# Altium PCB Motor Controller_v1.2.PcbDoc
Units mm, origin at the board's own origin, x right, y up, seen from the top; angles counter-clockwise.
Board outline 57 x 53.13 mm, 2 copper layers (Top Layer, Bottom Layer); 17 components, 29 nets, 114 pads, 10 vias.
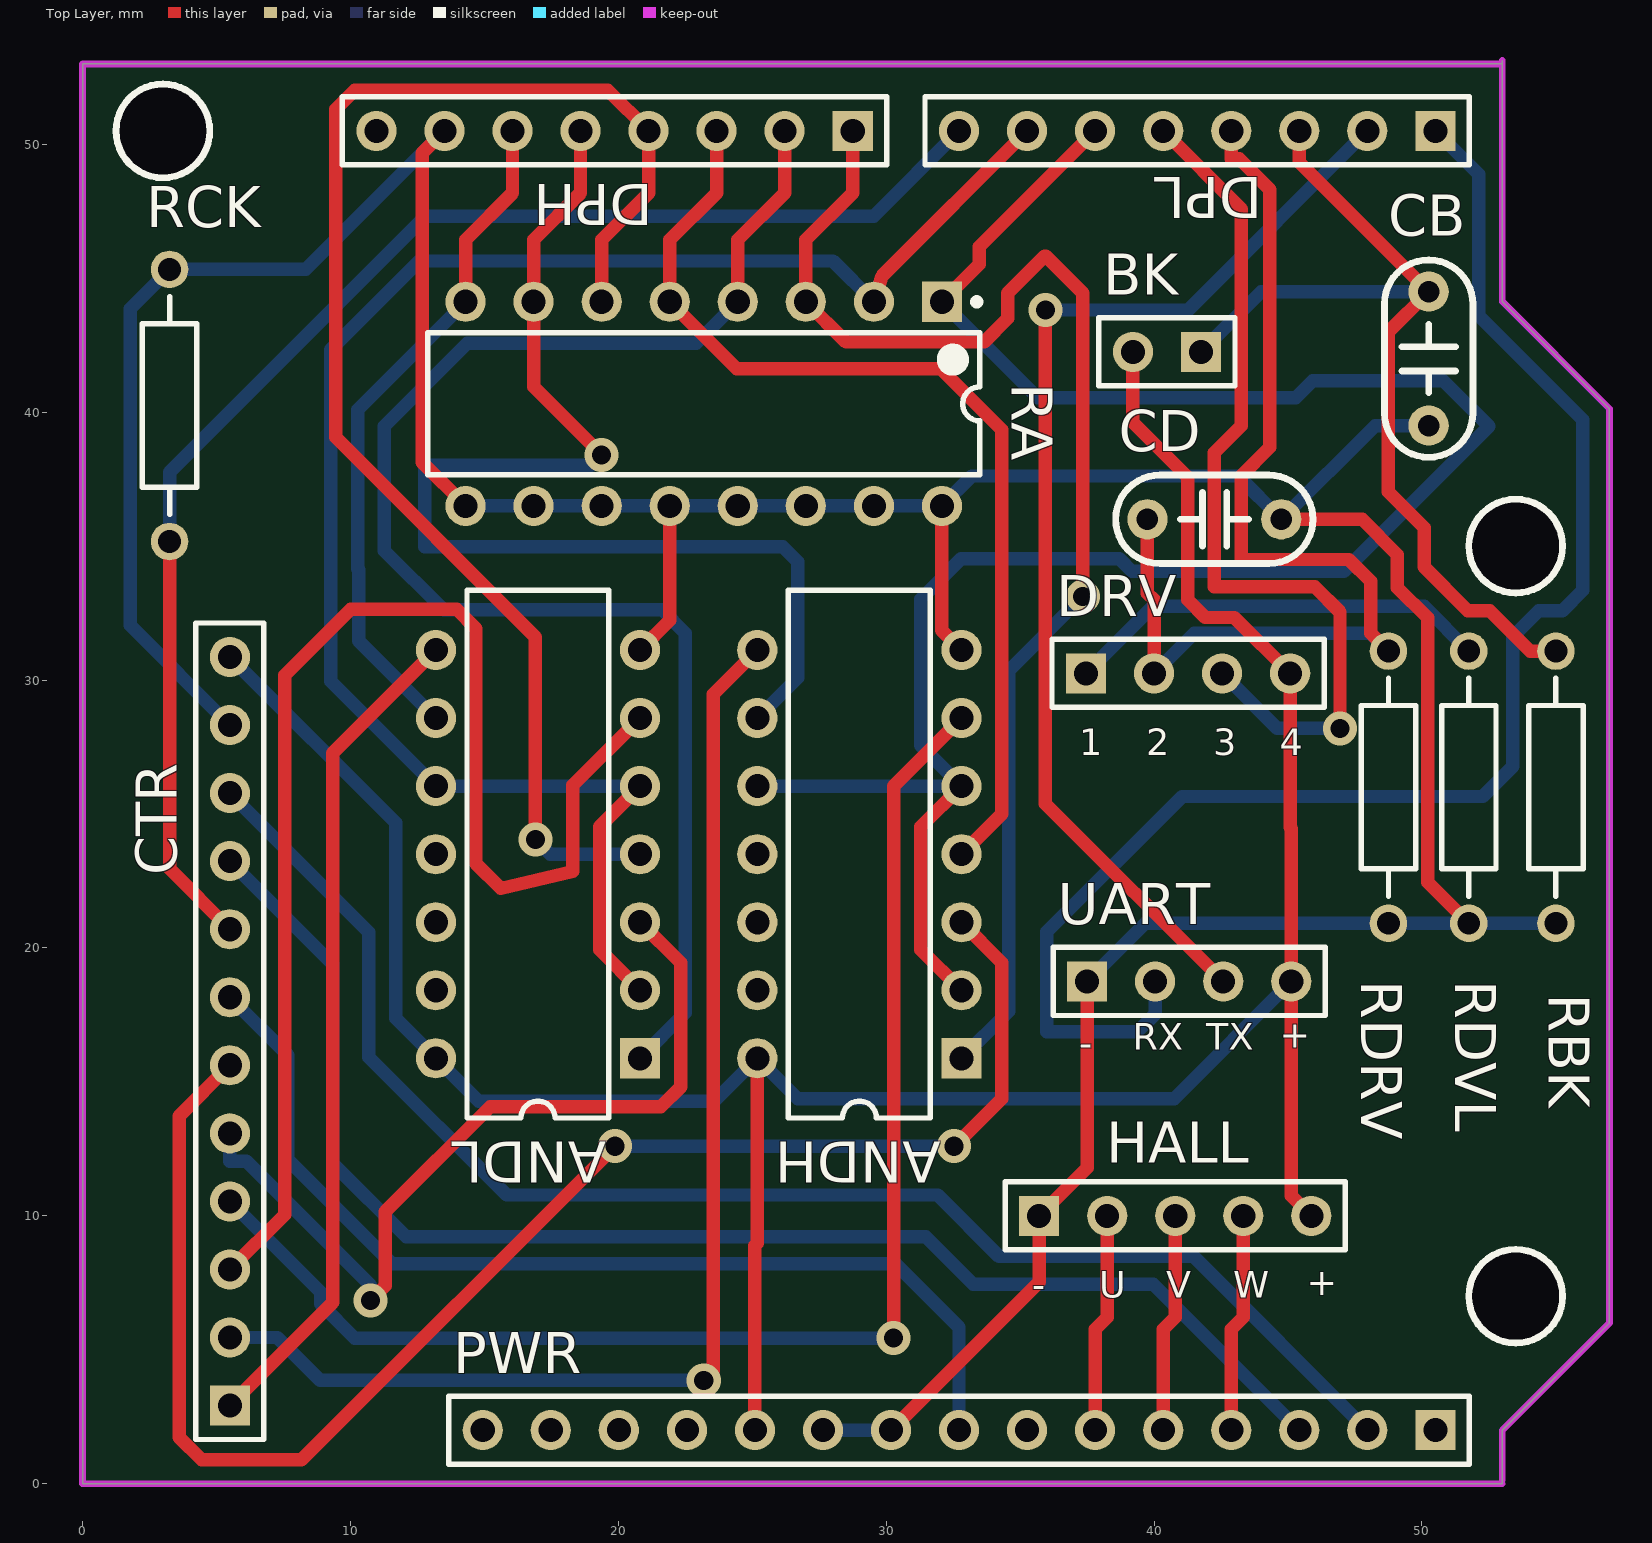
[diagram p0: Top Layer view]
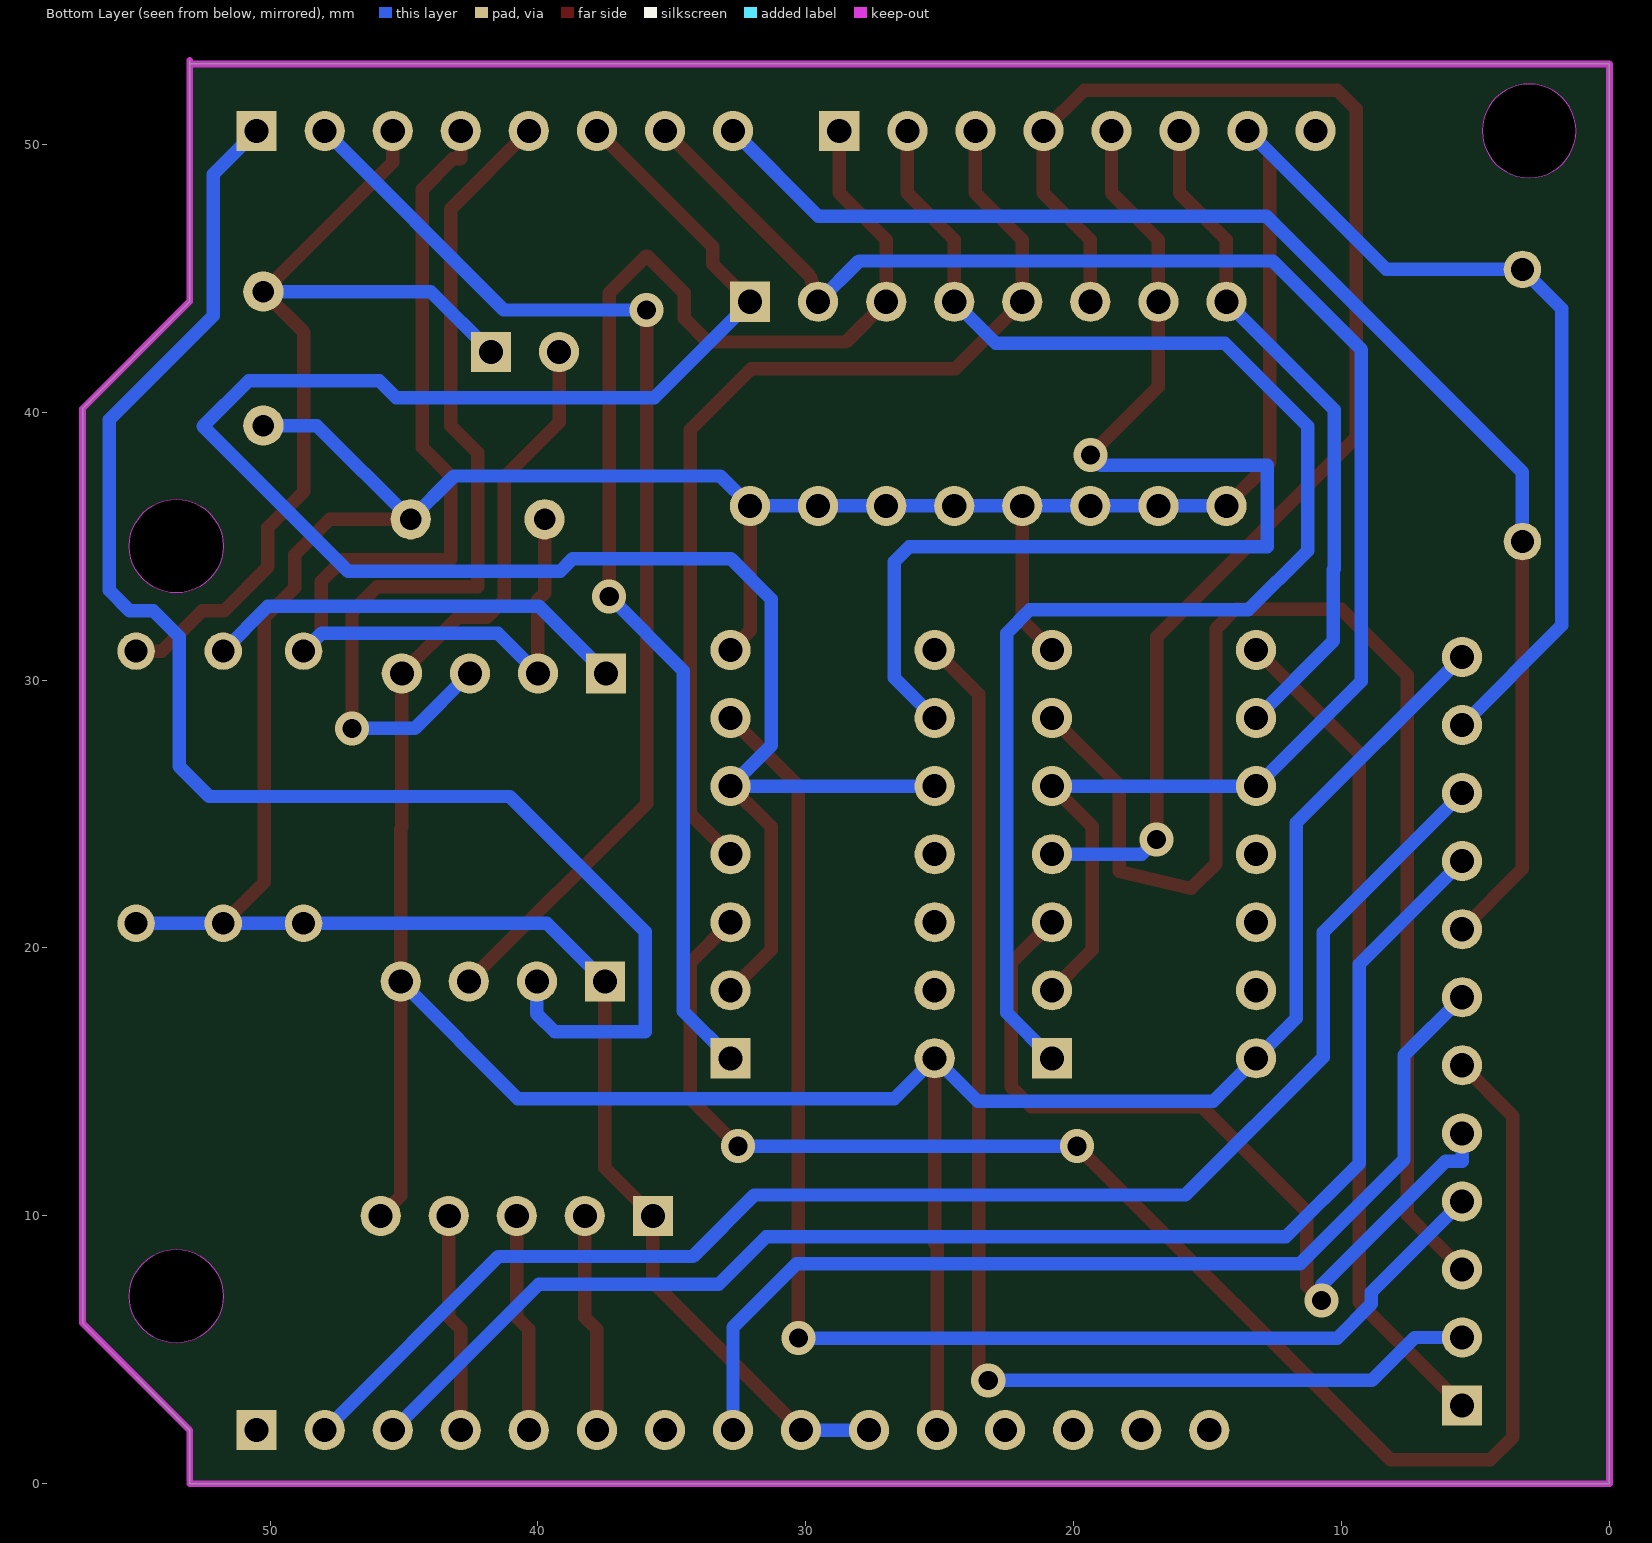
[diagram p1: Bottom Layer view, seen from below]

## Layer stack, top to bottom
Top Solder: solder mask 0.0102, Solder Resist, Dk 3.5
Top Layer: signal copper 0.0356
Dielectric 1: dielectric 0.32, FR-4, Dk 4.8
Bottom Layer: signal copper 0.0356
Bottom Solder: solder mask 0.0102, Solder Resist, Dk 3.5

## Board outline
0,0 0,53 53,53 53,53.127 53,44.127 57,40.127 57,6 53,2 53,0
cut-out: 51.75,7 ccw(c53.5,7) 53.5,5.25 ccw(c53.5,7) 55.25,7 ccw(c53.5,7) 53.5,8.75 ccw(c53.5,7)
cut-out: 51.75,35 ccw(c53.5,35) 53.5,33.25 ccw(c53.5,35) 55.25,35 ccw(c53.5,35) 53.5,36.75 ccw(c53.5,35)
cut-out: 3,48.75 cw(c3,50.5) 1.25,50.5 cw(c3,50.5) 3,52.25 cw(c3,50.5) 4.75,50.5 cw(c3,50.5)

## Design rules (kind name [scope] priority, off if disabled: settings)
Clearance [All] p1: gap=0.5 ignorepadtopadclearanceinfootprint=FALSE
PolygonConnect [All] p1: connectstyle=Relief reliefconductorwidth=0.254 reliefentries=4 polygonreliefangle="90 Angle" airgapwidth=0.254
RoutingVias [All] p1: holewidth=0.711 width=1.27 viastyle="Through Hole" minholewidth=0.711 minwidth=1.27 maxholewidth=0.711 maxwidth=1.27
SolderMaskExpansion [All] p1: expansion=0.102 istentingtop=FALSE
Width [All] p1: maxlimit=1 minlimit=0.254 preferedwidth=0.5
30 further rules are at their usual default settings.

## Components (designator, comment, footprint, x,y, rotation, side; value= is the part's Value field where it differs from the comment)
ANDH "SN74ALS08N" N014 29,23.5 r90 top
ANDL "SN74ALS08N" N014 17,23.5 r90 top
BK "Header 2" HDR1X2 41.75,42.25 r180 top
CB "Cap" "CBB 6.3*6.3*5" 50.25,42 r90 top value=100pF
CD "Cap" "CBB 6.3*6.3*5" 42.25,36 r180 top value=100pF
CTR "Header 12" HDR1X12 5.5,2.92 r90 top
DPH "Header 8" HDR1X8 28.75,50.5 r180 top
DPL "Header 8" HDR1X8 50.5,50.5 r180 top
DRV "Header 4" HDR1X4 37.46,30.25 r0 top
HALL "Header 5" HDR1X5 35.71,10 r0 top
PWR "Header 15" HDR1X15 50.5,2 r180 top
RA "Res Pack2" DIP-16 23.19,40.31 r270 top value=1K
RBK "Res2" AXIAL-0.4 55,26 r90 top value=1K
RCK "Res2" AXIAL-0.4 3.25,40.25 r270 top value=1K
RDRV "Res2" AXIAL-0.4 48.75,26 r90 top value=1K
RDVL "Res2" AXIAL-0.4 51.75,26 r90 top value=220
UART "Header 4" HDR1X4 37.5,18.75 r0 top

## Footprints (in the part's own frame and the unit in brackets; to place one, negate y for a bottom-side part, rotate by r counter-clockwise, add the part's x,y. Pads: shape width x height; smd on the part's side, far side on the other; paste and mask are expansions set on the pad)
AXIAL-0.4 [mm] "Axial Device, Thru-Hole; 2 Leads; 0.4 in Pin Spacing"
  round 1.4 hole 0.85: 1(-5.08,0) 2(5.08,0)
  silkscreen extent -4.06,-1.02 4.06,1.02
"CBB 6.3*6.3*5" [mm] "脚距5mm高6.3mm厚3mm"
  round 1.5 hole 0.8: 1(-2.5,0) 2(2.5,0)
  silkscreen extent -3.68,-1.65 3.68,1.65, body extent -3.15,-1.5 3.15,1.5, height 6.8
DIP-16 [mm] "DIP; 16 Leads; Row Spacing 7.62 mm; Pitch 2.54 mm"
  rect 1.5x1.5 hole 0.9: 1(-3.81,8.89)
  round 1.5 hole 0.9: 2(-3.81,6.35) 3(-3.81,3.81) 4(-3.81,1.27) 5(-3.81,-1.27) 6(-3.81,-3.81) 7(-3.81,-6.35) 8(-3.81,-8.89) 9(3.81,-8.89) 10(3.81,-6.35) 11(3.81,-3.81) 12(3.81,-1.27) 13(3.81,1.27) 14(3.81,3.81) 15(3.81,6.35) 16(3.81,8.89)
  silkscreen extent -3.93,-10.3 2.65,10.32, body extent -3.6,-10.28 3.6,10.28, height 5.08
HDR1X2 [mm] "Connector; Header; 2 Position"
  rect 1.5x1.5 hole 0.9: 1(0,0)
  round 1.5 hole 0.9: 2(2.54,0)
  silkscreen extent -1.27,-1.27 3.81,1.27
HDR1X4 [mm] "Connector; Header; 4 Position"
  rect 1.5x1.5 hole 0.9: 1(0,0)
  round 1.5 hole 0.9: 2(2.54,0) 3(5.08,0) 4(7.62,0)
  silkscreen extent -1.27,-1.27 8.89,1.27
HDR1X5 [mm] "Connector; Header; 5 Position"
  rect 1.5x1.5 hole 0.9: 1(0,0)
  round 1.5 hole 0.9: 2(2.54,0) 3(5.08,0) 4(7.62,0) 5(10.16,0)
  silkscreen extent -1.27,-1.27 11.43,1.27
HDR1X8 [mm] "Connector; Header; 8 Position"
  rect 1.5x1.5 hole 0.9: 1(0,0)
  round 1.5 hole 0.9: 2(2.54,0) 3(5.08,0) 4(7.62,0) 5(10.16,0) 6(12.7,0) 7(15.24,0) 8(17.78,0)
  silkscreen extent -1.27,-1.27 19.05,1.27
HDR1X12 [mm] "Connector; Header; 12 Position"
  rect 1.5x1.5 hole 0.9: 1(0,0)
  round 1.5 hole 0.9: 2(2.54,0) 3(5.08,0) 4(7.62,0) 5(10.16,0) 6(12.7,0) 7(15.24,0) 8(17.78,0) 9(20.32,0) 10(22.86,0) 11(25.4,0) 12(27.94,0)
  silkscreen extent -1.27,-1.27 29.21,1.27
HDR1X15 [mm] "Connector; Header; 15 Position"
  rect 1.5x1.5 hole 0.9: 1(0,0)
  round 1.5 hole 0.9: 2(2.54,0) 3(5.08,0) 4(7.62,0) 5(10.16,0) 6(12.7,0) 7(15.24,0) 8(17.78,0) 9(20.32,0) 10(22.86,0) 11(25.4,0) 12(27.94,0) 13(30.48,0) 14(33.02,0) 15(35.56,0)
  silkscreen extent -1.27,-1.27 36.83,1.27
N014 [mm] "DIP; 14 Leads; Row Spacing 7.62 mm; Pitch 2.54 mm"
  rect 1.5x1.5 hole 0.9: 1(-7.62,-3.81)
  round 1.5 hole 0.9: 2(-5.08,-3.81) 3(-2.54,-3.81) 4(0,-3.81) 5(2.54,-3.81) 6(5.08,-3.81) 7(7.62,-3.81) 8(7.62,3.81) 9(5.08,3.81) 10(2.54,3.81) 11(0,3.81) 12(-2.54,3.81) 13(-5.08,3.81) 14(-7.62,3.81)
  silkscreen extent -9.85,-2.65 9.85,2.65

## Part data
ANDH ANDL: "Quadruple 2-Input Positive-AND Gate", ComponentLink1Description="Manufacturer Link", ComponentLink1URL=http://www.ti.com/, ComponentLink2Description=Datasheet, ComponentLink2URL=http://www-s.ti.com/sc/ds/sn74als08.pdf, ComponentLink3Description="Packaging Specification", ComponentLink3URL=http://focus.ti.com/lit/ml/mpdi002c/mpdi002c.pdf, DatasheetVersion=Dec-1994, LatestRevisionDate=04-Mar-2005, LatestRevisionNote="Stylized 3D Model Added.", PackageDescription="DIP; 14 Leads; Row Spacing 7.62 mm; Pitch 2.54 mm", PackageReference=N014, PackageVersion=Oct-1995, Published=8-Jun-2000, Publisher="Altium Limited"
BK: "Header, 2-Pin", LatestRevisionDate=17-Jul-2002, LatestRevisionNote="Re-released for DXP Platform.", Publisher="Altium Limited"
CB CD: "Capacitor", LatestRevisionDate=17-Jul-2002, LatestRevisionNote="Re-released for DXP Platform.", PackageDescription="Radial Cap, Thru-Hole; 2 Leads; 0.3 in Pin Spacing", PackageReference=RAD-0.3, Published=8-Jun-2000, Publisher="Altium Limited"
CTR: "Header, 12-Pin", LatestRevisionDate=17-Jul-2002, LatestRevisionNote="Re-released for DXP Platform.", Publisher="Altium Limited"
DPH DPL: "Header, 8-Pin", LatestRevisionDate=17-Jul-2002, LatestRevisionNote="Re-released for DXP Platform.", Publisher="Altium Limited"
DRV UART: "Header, 4-Pin", LatestRevisionDate=17-Jul-2002, LatestRevisionNote="Re-released for DXP Platform.", Publisher="Altium Limited"
HALL: "Header, 5-Pin", LatestRevisionDate=17-Jul-2002, LatestRevisionNote="Re-released for DXP Platform.", Publisher="Altium Limited"
PWR: "Header, 15-Pin", LatestRevisionDate=17-Jul-2002, LatestRevisionNote="Re-released for DXP Platform.", Publisher="Altium Limited"
RA: "Isolated Resistor Network - Parts", Code_JEDEC=MO-001-AC, LatestRevisionDate=17-Jul-2002, LatestRevisionNote="Re-released for DXP Platform.", PackageReference=DIP-16, Published=24-Mar-1999, Publisher="Altium Limited", Sim Note="Enter the Resistance value into parameter field."
RBK RCK RDRV RDVL: "Resistor", LatestRevisionDate=17-Jul-2002, LatestRevisionNote="Re-released for DXP Platform.", PackageDescription="Axial Device, Thru-Hole; 2 Leads; 0.4 in Pin Spacing", PackageReference=AXIAL-0.4, Published=8-Jun-2000, Publisher="Altium Limited"

## Via types
v1: diameter 1.27, hole 0.711, Top Layer to Bottom Layer, 10 vias

## Nets (pads, with @x,y where several pads share a name; then routed paths per layer and width w, separated by ;. In a path a pad name is that pad's centre, name@x,y a point inside that pad or via, vN(x,y) a via of type N, cw(c..) or ccw(c..) an arc to the next point about the centre after c; other vN are vias at no path point)
BK_SW: BK.1 CB.2 DPL.3 RBK.2 | length 35.1
  Top Layer w0.5: DPL.3 45.42,49.33 CB.2 48.743,42.993 48.743,37.025 50.083,35.684 50.083,34.219 51.714,32.588 52.527,32.588 54.035,31.08 RBK.2
  Bottom Layer w0.5: BK.1 44,44.5 CB.2
BVS: CTR.9 PWR.3 | length 53.1
  Bottom Layer w0.5: CTR.9 9.347,19.393 9.347,11.955 12.085,9.218 31.479,9.218 33.247,7.45 39.97,7.45 PWR.3
CK: CTR.8 DPL.8 RCK.2 | length 52.7
  Top Layer w0.5: RCK.2 3.25,22.95 CTR.8
  Bottom Layer w0.5: RCK.2 3.25,37.769 12.802,47.32 29.54,47.32 DPL.8
CS: CTR.10 PWR.2 | length 55
  Bottom Layer w0.5: CTR.10 10.69,20.59 10.69,15.92 15.833,10.777 31.92,10.777 34.213,8.484 41.476,8.484 PWR.2
DRIVE_LED: DPL.5 DRV.3 | length 33.3
  Top Layer w0.5: DPL.5 43.256,47.584 43.256,39.487 42.25,38.481 42.25,33.477 46.002,33.477 46.939,32.54 v1(46.939,28.194)
  Bottom Layer w0.5: DRV.3 44.596,28.194 v1(46.939,28.194)
DRIVE_SW: CD.2 DPL.4 DRV.2 RDRV.2 | length 40.8
  Top Layer w0.5: CD.2 39.75,33.245 40,32.995 DRV.2 ; DPL.4 42.88,49.454 43.18,49.454 44.323,48.311 44.323,38.69 43.25,37.617 43.25,34.5 47.268,34.5 48.083,33.684 48.083,31.747 RDRV.2
  Bottom Layer w0.5: DRV.2 41.5,31.75 48.08,31.75 RDRV.2
GND: ANDH.7 ANDL.7 CB.1 CD.1 CTR.11 DPH.7 HALL.1 PWR.9 PWR.10 RA.9 RA.10 RA.11 RA.12 RA.13 RA.14 RA.15 RA.16 RBK.1 RCK.1 RDRV.1 RDVL.1 UART.1 | length 157.1
  Top Layer w0.5: DPH.7 12.675,49.665 12.675,38.125 RA.9 ; ANDL.7 21.92,32.23 RA.12 ; PWR.9 35.71,7.53 HALL.1 37.5,11.79 UART.1 ; RA.16 32.08,31.85 ANDH.7 ; CD.1 47.768,36 49.083,34.684 49.083,33.452 50.216,32.319 50.216,22.454 RDVL.1
  Bottom Layer w0.5: CTR.11 1.778,32.042 1.778,43.858 RCK.1 8.34,45.33 DPH.7 ; RA.9 RA.10 RA.11 RA.12 RA.13 RA.14 RA.15 RA.16 33.197,37.617 43.133,37.617 CD.1 48.25,39.5 CB.1 ; PWR.10 PWR.9 ; UART.1 39.67,20.92 RDRV.1 RDVL.1 RBK.1
HAU: HALL.2 PWR.6 | length 8.2
  Top Layer w0.5: PWR.6 37.8,5.766 38.25,6.216 HALL.2
HAV: HALL.3 PWR.5 | length 8.2
  Top Layer w0.5: PWR.5 40.34,5.766 40.79,6.216 HALL.3
HAW: HALL.4 PWR.4 | length 8.2
  Top Layer w0.5: PWR.4 42.88,5.766 43.33,6.216 HALL.4
NetDRV_1: DRV.1 RDVL.2 | length 16
  Bottom Layer w0.5: DRV.1 39.96,32.75 50.08,32.75 RDVL.2
PWMH: ANDH.2 ANDH.5 ANDH.10 DPL.6 RA.1 | length 80
  Top Layer w0.5: RA.1 33.48,45.52 33.48,46.18 DPL.6 ; ANDH.2 31.293,19.937 31.293,24.523 ANDH.5
  Bottom Layer w0.5: ANDH.10 ANDH.5 31.293,27.557 31.293,33.02 32.794,34.521 38.711,34.521 39.171,34.061 47.092,34.061 52.502,39.472 50.8,41.173 45.923,41.173 45.288,40.538 35.662,40.538 RA.1
PWML: ANDL.2 ANDL.5 ANDL.10 DPL.7 RA.2 | length 65.4
  Top Layer w0.5: ANDL.2 19.304,19.926 19.304,24.534 ANDL.5 ; RA.2 29.845,45.085 DPL.7
  Bottom Layer w0.5: ANDL.5 ANDL.10 9.268,29.962 9.268,42.339 12.573,45.644 28.016,45.644 RA.2
RX: DPL.1 UART.2 | length 56.8
  Bottom Layer w0.5: UART.2 40.04,17.536 39.37,16.866 35.992,16.866 35.992,20.599 41.046,25.654 52.273,25.654 53.391,26.772 53.391,31.623 54.356,32.588 55.245,32.588 56.007,33.35 56.007,39.711 52.121,43.597 52.121,48.879 DPL.1
TX: DPL.2 UART.3 | length 42.6
  Top Layer w0.5: v1(35.941,43.815) 35.941,25.389 UART.3
  Bottom Layer w0.5: v1(35.941,43.815) 41.275,43.815 DPL.2
UH: ANDH.1 DPH.1 RA.3 | length 51
  Top Layer w0.5: DPH.1 28.75,48.181 27,46.431 RA.3 28.5,42.62 33.655,42.62 34.544,43.509 34.544,44.45 35.924,45.83 35.958,45.83 37.338,44.45 v1(37.338,33.122)
  Bottom Layer w0.5: ANDH.1 34.569,17.639 34.569,30.353 v1(37.338,33.122)
UHG: ANDH.3 CTR.6 | length 58.5
  Top Layer w0.5: CTR.6 3.607,13.727 3.607,1.727 4.445,0.889 8.175,0.889 v1(19.884,12.598) ; v1(32.537,12.598) 34.315,14.376 34.315,19.455 ANDH.3
  Bottom Layer w0.5: v1(19.884,12.598) v1(32.537,12.598)
UL: ANDL.1 DPH.2 RA.4 | length 55.9
  Top Layer w0.5: RA.4 24.46,46.431 26.21,48.181 DPH.2
  Bottom Layer w0.5: ANDL.1 22.504,17.574 22.504,31.75 21.634,32.62 13.482,32.62 11.268,34.834 11.268,39.476 14.363,42.57 22.91,42.57 RA.4
ULG: ANDL.3 CTR.5 | length 32.1
  Top Layer w0.5: v1(10.744,6.833) 11.303,7.391 11.303,10.16 15.215,14.072 21.59,14.072 22.327,14.808 22.327,19.443 ANDL.3
  Bottom Layer w0.5: CTR.5 5.5,12.04 6.121,12.04 10.744,7.417 v1(10.744,6.833)
VCC: ANDH.14 ANDL.14 BK.2 CTR.12 DRV.4 HALL.5 PWR.11 UART.4 | length 103.4
  Top Layer w0.5: PWR.11 25.1,8.89 25.19,8.98 ANDH.14 ; BK.2 39.21,39.617 41.25,37.577 41.25,32.995 41.91,32.335 42.995,32.335 DRV.4 45.08,24.5 45.12,24.46 UART.4 45.12,10.75 HALL.5
  Bottom Layer w0.5: CTR.12 11.69,24.67 11.69,17.38 ANDL.14 14.795,14.275 23.585,14.275 ANDH.14 26.694,14.376 40.746,14.376 UART.4
VH: ANDH.4 DPH.3 RA.5 | length 37.9
  Top Layer w0.5: DPH.3 23.67,48.181 21.92,46.431 RA.5 24.42,41.62 32.04,41.62 34.31,39.35 34.31,25 ANDH.4
VHG: ANDH.6 CTR.4 | length 51.3
  Top Layer w0.5: v1(30.277,5.437) 30.277,26.047 ANDH.6
  Bottom Layer w0.5: CTR.4 8.89,7.15 8.89,6.707 10.16,5.437 v1(30.277,5.437)
VIN: CTR.7 PWR.8 | length 38.4
  Bottom Layer w0.5: CTR.7 7.671,15.989 7.671,12.1 11.553,8.218 30.349,8.218 32.72,5.847 PWR.8
VL: ANDL.4 DPH.4 RA.6 | length 54.2
  Top Layer w0.5: v1(16.905,24.054) 16.905,31.609 9.449,39.065 9.449,51.308 10.16,52.019 19.611,52.019 DPH.4 21.13,48.181 19.38,46.431 RA.6
  Bottom Layer w0.5: v1(16.905,24.054) 17.459,23.5 ANDL.4
VLG: ANDL.6 CTR.3 | length 51.1
  Top Layer w0.5: CTR.3 7.544,10.044 7.544,30.175 10.008,32.639 13.97,32.639 14.69,31.919 14.69,23.145 15.61,22.225 18.304,22.86 18.304,26.074 ANDL.6
WH: ANDH.9 DPH.5 RA.7 | length 44.3
  Top Layer w0.5: DPH.5 18.59,48.181 16.84,46.431 RA.7 16.84,40.945 v1(19.38,38.405)
  Bottom Layer w0.5: v1(19.38,38.405) 18.999,38.024 12.776,38.024 12.776,34.976 26.137,34.976 26.695,34.417 26.695,30.085 ANDH.9
WHG: ANDH.8 CTR.2 | length 46.4
  Top Layer w0.5: v1(23.19,3.861) 23.546,4.216 23.546,29.476 ANDH.8
  Bottom Layer w0.5: CTR.2 7.265,5.46 8.865,3.861 v1(23.19,3.861)
WL: ANDL.9 DPH.6 RA.8 | length 25.5
  Top Layer w0.5: RA.8 14.3,46.431 16.05,48.181 DPH.6
  Bottom Layer w0.5: ANDL.9 10.311,31.459 10.311,34.114 10.268,34.157 10.268,40.088 RA.8
WLG: ANDL.8 CTR.1 | length 31.4
  Top Layer w0.5: CTR.1 9.347,6.767 9.347,27.277 ANDL.8
pads on no net: ANDH.11 ANDH.12 ANDH.13 ANDL.11 ANDL.12 ANDL.13 DPH.8 PWR.1 PWR.7 PWR.12 PWR.13 PWR.14 PWR.15

## Keep-outs
Keep-Out Layer:
  lines w0.254: 53,0 0,0 0,53 53,53 ; 53,0.127 53,1.127 53,2 57,6 57,7.127 57,40.127 53,44.127 53,53.127

## Silkscreen, mask and mechanical layers (free items; w line width, h text height)
Top Overlay:
  circle w0.254: c3,50.5 r1.75
  circle w0.254: c53.5,35 r1.75
  circle w0.254: c53.5,7 r1.75
  text "1" at 37.2,27.2 h1
  text "2" at 39.7,27.2 h1
  text "3" at 42.2,27.2 h1
  text "4" at 44.7,27.2 h1
  text "+" at 44.7,16.283 h1
  text "RX" at 39.2,16.2 h1
  text "TX" at 41.95,16.2 h1
  text "-" at 37.2,15.95 h1
  text "+" at 45.7,7.033 h1
  text "-" at 35.45,6.95 h1
  text "U" at 37.95,6.95 h1
  text "V" at 40.45,6.95 h1
  text "W" at 42.95,6.95 h1